# Altium PCB PCB.PcbDoc
Units mm, origin at the board's own origin, x right, y up, seen from the top; angles counter-clockwise.
Board outline 32.7 x 38.1 mm, 2 copper layers (Top Layer, Bottom Layer); 21 components, 26 nets, 84 pads, 0 vias.
Unrouted connection lines stored in the file: 9.
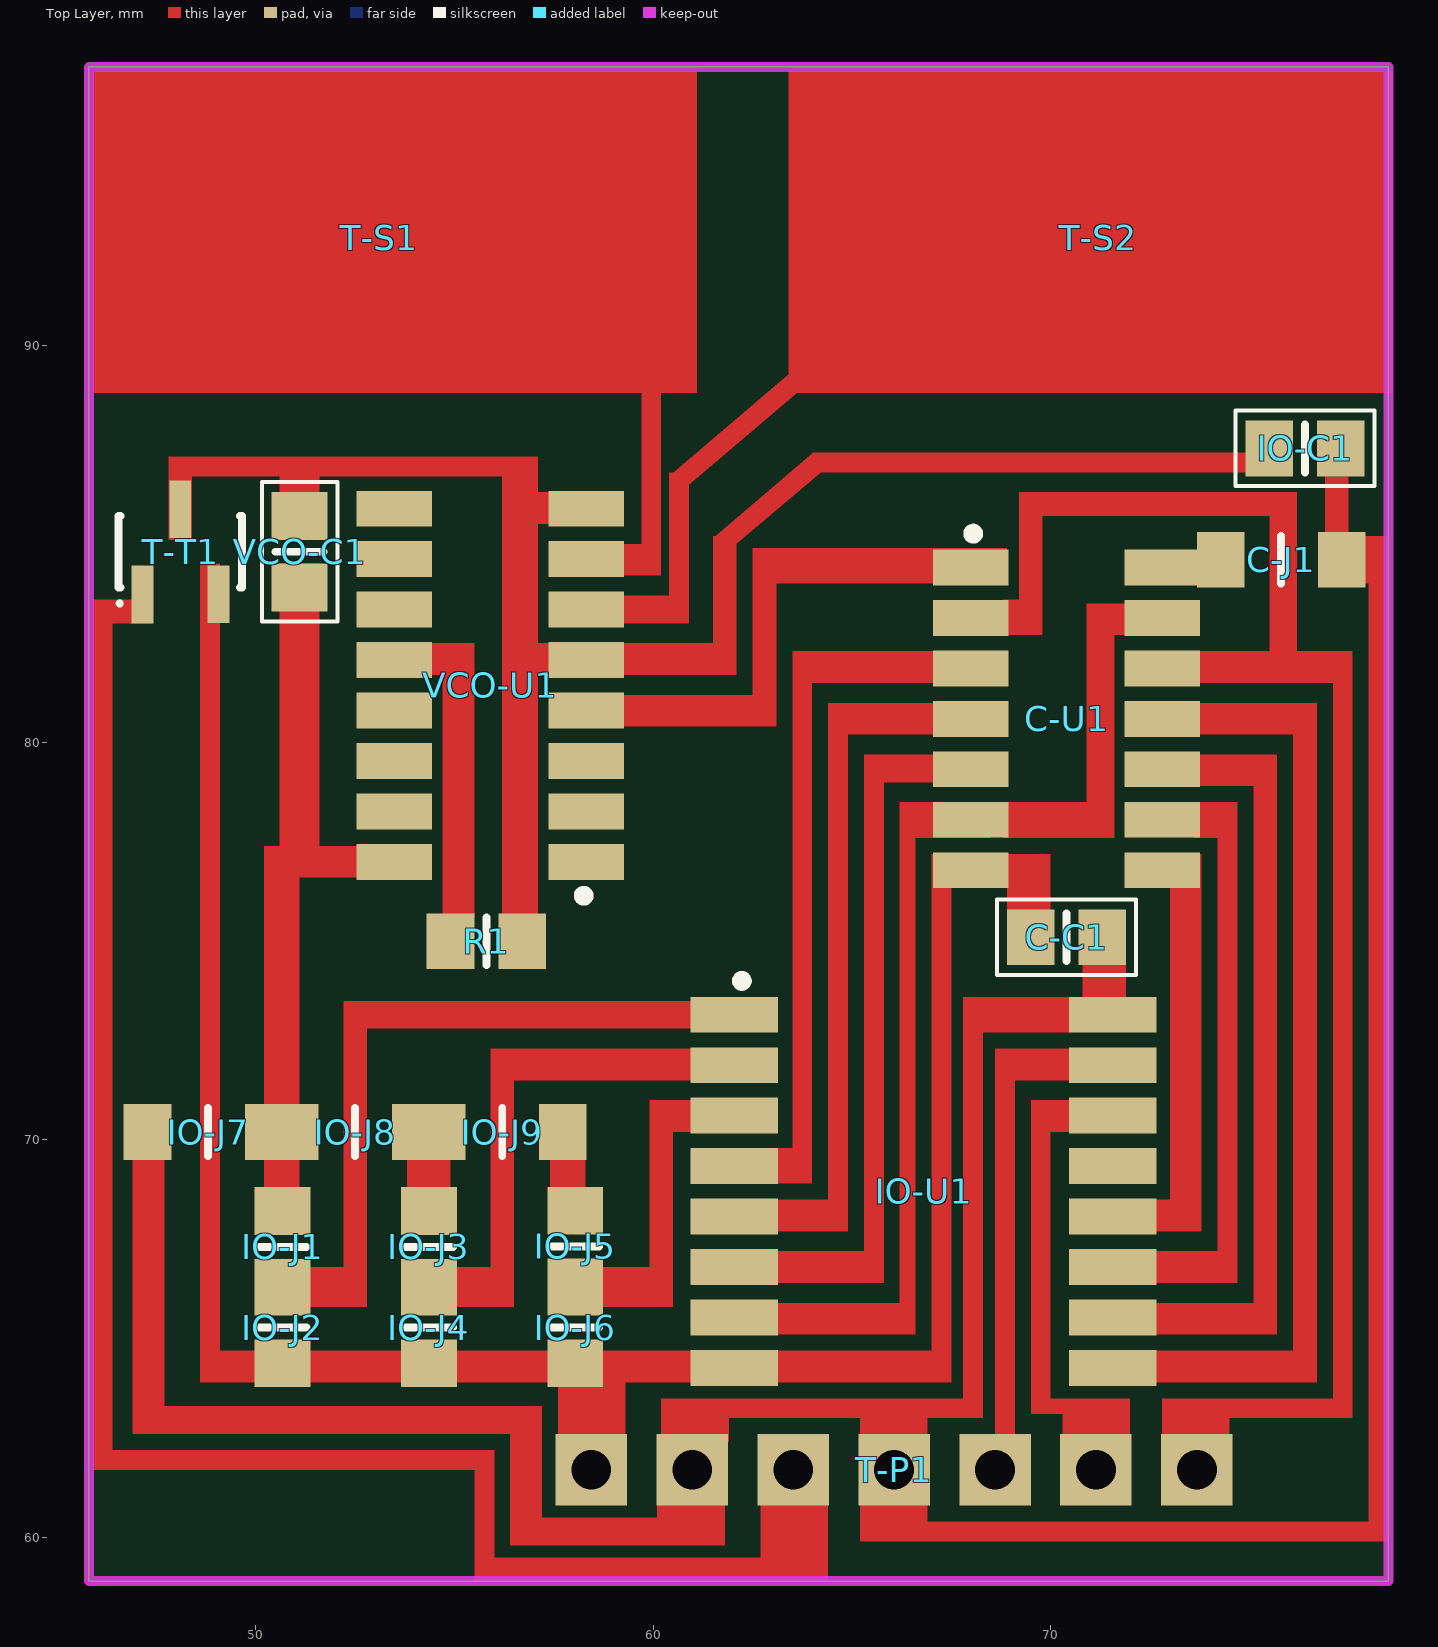
[diagram p0: Top Layer view]
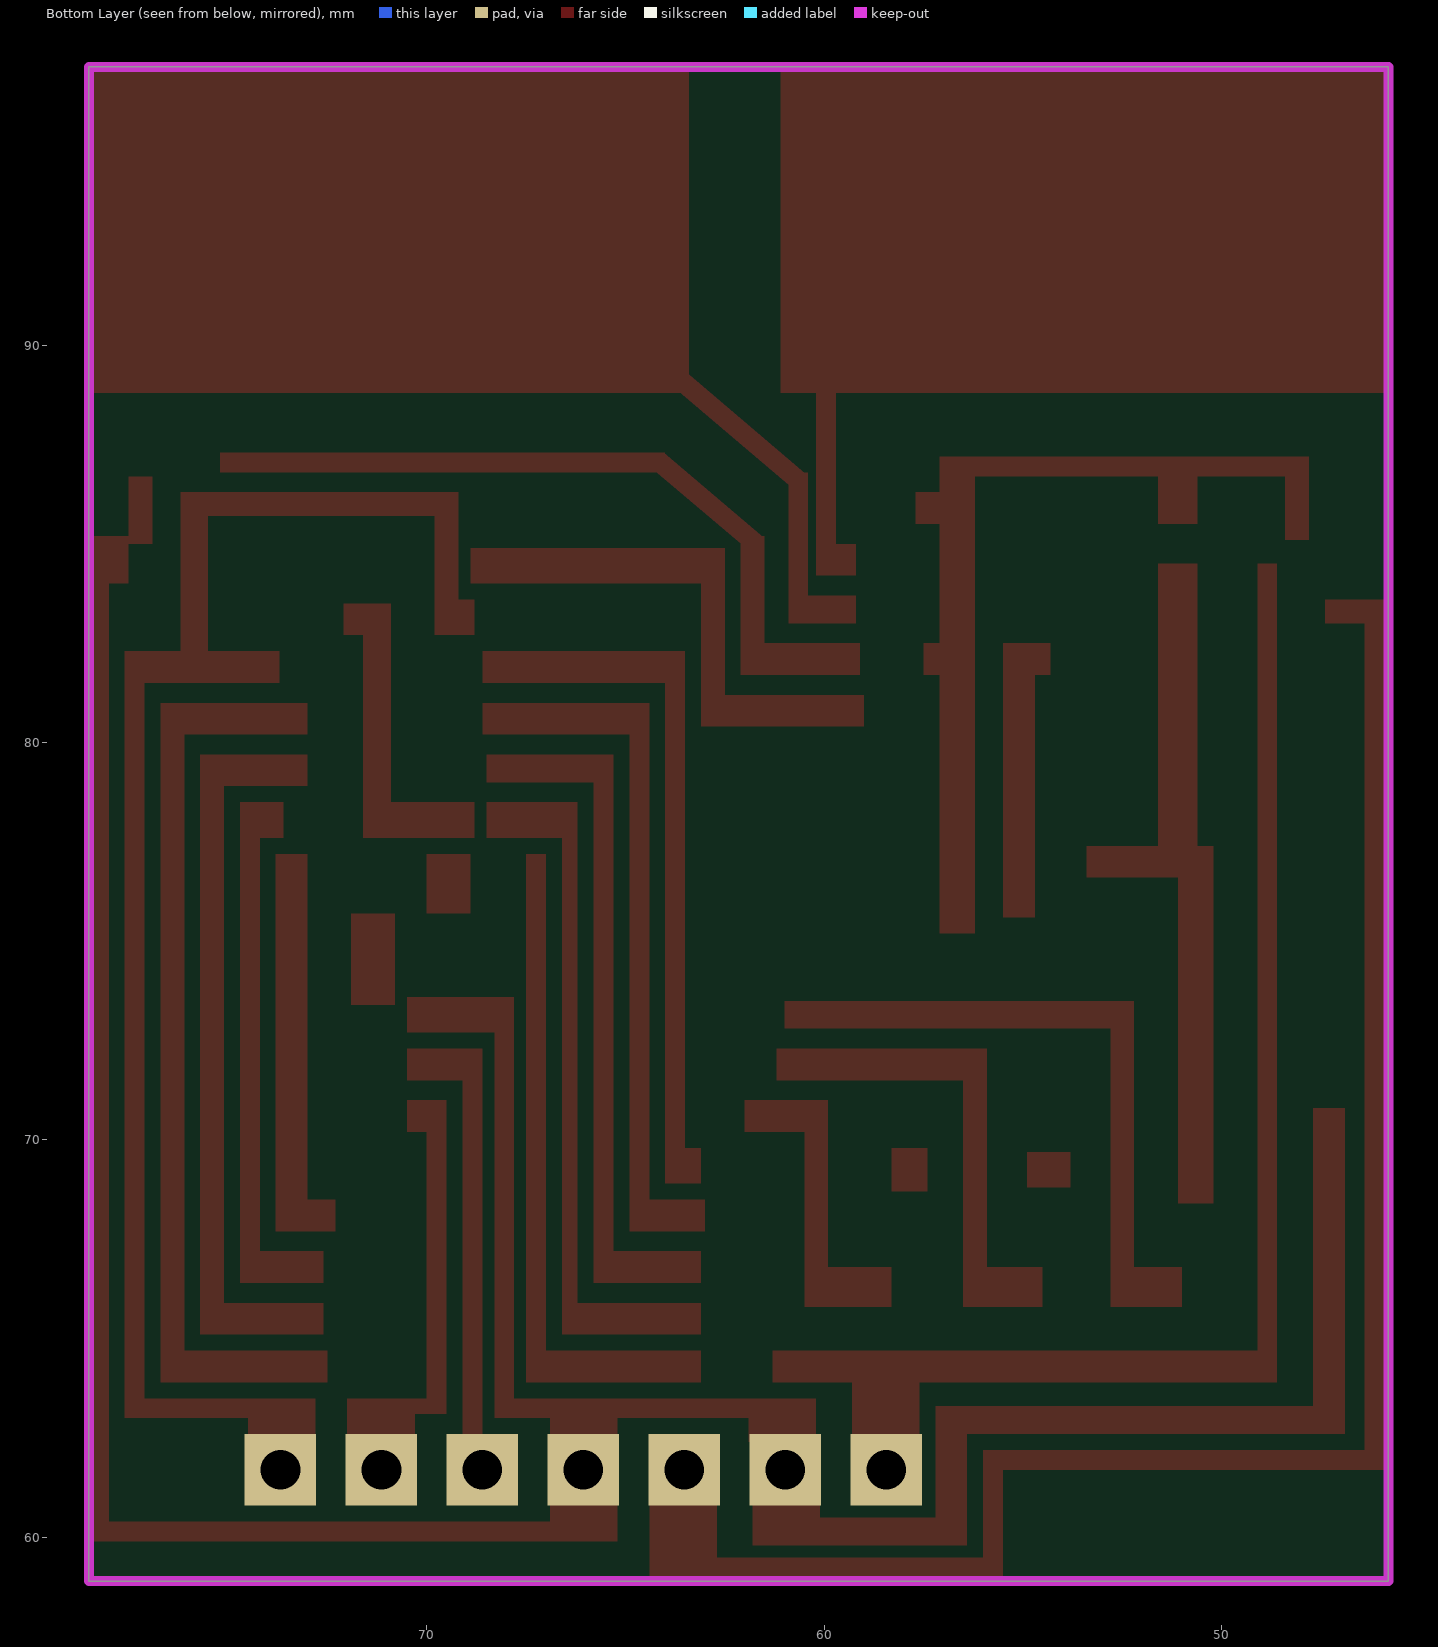
[diagram p1: Bottom Layer view, seen from below]

## Layer stack, top to bottom
Top Solder: solder mask 0.0102, Solder Resist, Dk 3.5
Top Layer: signal copper 0.0356
Dielectric 1: dielectric 0.32, FR-4, Dk 4.8
Bottom Layer: signal copper 0.0356
Bottom Solder: solder mask 0.0102, Solder Resist, Dk 3.5

## Board outline
45.8,58.9 45.8,97 78.5,97 78.5,58.9

## Design rules (kind name [scope] priority, off if disabled: settings)
Clearance [All] p1: gap=0.254
PolygonConnect [All] p1: connectstyle=Relief reliefconductorwidth=0.254 reliefentries=4 polygonreliefangle="90 Angle" airgapwidth=0.254
RoutingVias [All] p1: holewidth=0.711 width=1.27 viastyle="Through Hole" minholewidth=0.711 minwidth=1.27 maxholewidth=0.711 maxwidth=1.27
SolderMaskExpansion [All] p1: expansion=0.102
UnpouredPolygon [All] p1: allowunpoured=FALSE
Width [All] p1: maxlimit=0.254 minlimit=0.254 preferedwidth=0.254
29 further rules are at their usual default settings.

## Classes and differential pairs
component class 74HC393: C-C1 C-J1 C-U1
component class CD4046: R1 T-T1 VCO-C1 VCO-U1
component class Designator: IO-C1 IO-J1 IO-J2 IO-J3 IO-J4 IO-J5 IO-J6 IO-J7 IO-J8 IO-J9 IO-U1
component class Top: T-P1 T-S1 T-S2

## Components (designator, comment, footprint, x,y, rotation, side; value= is the part's Value field where it differs from the comment)
C-C1 "1uF" "C 0805 / 2012" 70.4,75.1 r180 top
C-J1 "0R" "R 0805 / 2012 wide" 75.8,84.6 r0 top
C-U1 "74HC393" SOIC-14 70.4,82.5 r0 top
IO-C1 "1uF" "C 0805 / 2012" 76.4,87.4 r180 top
IO-J1 "0R" "R 0805 / 2012" 50.673,67.31 r90 top
IO-J2 "0R" "R 0805 / 2012" 50.673,65.278 r90 top
IO-J3 "0R" "R 0805 / 2012" 54.356,67.31 r90 top
IO-J4 "0R" "R 0805 / 2012" 54.356,65.278 r90 top
IO-J5 "0R" "R 0805 / 2012" 58.039,67.321 r90 top
IO-J6 "0R" "R 0805 / 2012" 58.039,65.278 r90 top
IO-J7 "0R" "R 0805 / 2012 wide" 48.8,70.2 r180 top
IO-J8 "0R" "R 0805 / 2012 wide" 52.5,70.2 r180 top
IO-J9 "0R" "R 0805 / 2012 wide" 56.2,70.2 r180 top
IO-U1 "PCF8574" SOIC-16W 66.802,68.707 r0 top
R1 "100K" "R 0805 / 2012" 55.8,75 r0 top
T-P1 "Header 1x7" "Header 1x7" 68.6,61.7 r180 top
T-S1 "Screw M3" "Screw M3" 53.1,92.7 r0 top
T-S2 "Screw M3" "Screw M3" 71.2,92.7 r0 top
T-T1 "2N7000" SOT-23-3 48.1,84.8 r0 top
VCO-C1 "1uF" "C 0805 / 2012" 51.1,84.8 r90 top
VCO-U1 "CD4046" SOIC-16 55.9,78.9 r180 top

## Footprints (in the part's own frame and the unit in brackets; to place one, negate y for a bottom-side part, rotate by r counter-clockwise, add the part's x,y. Pads: shape width x height; smd on the part's side, far side on the other; paste and mask are expansions set on the pad)
"C 0805 / 2012" [mm] "Capacitor 0805 / 2012 (2.0 x 1.2 mm)"
  rect 1.2x1.4 smd: 1(-0.9,0) 2(0.9,0)
  silkscreen extent -1.75,-0.95 1.75,0.95, body extent -1,-0.62 1,0.62, height 0.78
"Header 1x7" [mm] "2.54mm"
  rect 1.8x1.8 hole 1: 1(-5.08,0) 2(-2.54,0) 3(0,0) 4(2.54,0) 5(5.08,0) 6(7.62,0) 7(10.16,0)
  body extent -6.35,-1.27 11.43,1.27, height 8.6
"R 0805 / 2012" [mm] "Resistor 0805 / 2012 (2.0 x 1.2 mm)"
  rect 1.2x1.4 smd: 1(-0.9,0) 2(0.9,0)
  silkscreen extent 0,-0.6 0,0.6, body extent -1,-0.62 1,0.62, height 0.45
"R 0805 / 2012 wide" [mm] "Resistor 0805 / 2012 (2.0 x 1.2 mm)"
  rect 1.2x1.4 smd: 1(-1.524,0) 2(1.524,0)
  silkscreen extent 0,-0.6 0,0.6, body extent -1,-0.62 1,0.62, height 0.45
"Screw M3" [mm]
  body extent -6,-6 6,6, height 11.2
SOIC-14 [mm]
  rect 1.9x0.9 smd: 1(-2.413,1.905) 2(-2.413,0.635) 3(-2.413,-0.635) 4(-2.413,-1.905) 5(-2.413,-3.175) 6(-2.413,-4.445) 7(-2.413,-5.715) 8(2.413,-5.715) 9(2.413,-4.445) 10(2.413,-3.175) 11(2.413,-1.905) 12(2.413,-0.635) 13(2.413,0.635) 14(2.413,1.905)
  silkscreen extent -2.47,2.63 -2.22,2.88, body extent -3.05,-6.28 3.03,2.47, height 1.75
SOIC-16 [mm]
  rect 1.9x0.9 smd: 1(-2.413,1.905) 2(-2.413,0.635) 3(-2.413,-0.635) 4(-2.413,-1.905) 5(-2.413,-3.175) 6(-2.413,-4.445) 7(-2.413,-5.715) 8(-2.413,-6.985) 9(2.413,-6.985) 10(2.413,-5.715) 11(2.413,-4.445) 12(2.413,-3.175) 13(2.413,-1.905) 14(2.413,-0.635) 15(2.413,0.635) 16(2.413,1.905)
  silkscreen extent -2.48,2.63 -2.23,2.88, body extent -3.03,-7.54 3.05,2.46, height 1.75
SOIC-16W [mm]
  rect 2.2x0.9 smd: 1(-4.763,4.445) 2(-4.763,3.175) 3(-4.763,1.905) 4(-4.763,0.635) 5(-4.763,-0.635) 6(-4.763,-1.905) 7(-4.763,-3.175) 8(-4.763,-4.445) 9(4.763,-4.445) 10(4.763,-3.175) 11(4.763,-1.905) 12(4.763,-0.635) 13(4.763,0.635) 14(4.763,1.905) 15(4.763,3.175) 16(4.763,4.445)
  silkscreen extent -4.7,5.17 -4.45,5.42, body extent -5.2,-5.25 5.2,5.25, height 2.65
SOT-23-3 [mm]
  rect 0.55x1.45 smd: 1(-0.95,-1.075) 2(0.965,-1.067) 3(0,1.067)
  silkscreen extent -1.57,-1.35 1.55,0.9, body extent -1.49,-1.32 1.51,1.28, height 1.1

## Part data
C-C1 IO-C1 VCO-C1: library part Capacitor
C-J1 IO-J1 IO-J2 IO-J3 IO-J4 IO-J5 IO-J6 IO-J7 IO-J8 IO-J9 R1: library part Resistor
C-U1: "Dual 4-Bit Counter"
IO-U1: "8-Bit I/O-Expander"
T-T1: "N-FET"
VCO-U1: "PLL / VCO"

## Nets (pads, with @x,y where several pads share a name; then routed paths per layer and width w, separated by ;. In a path a pad name is that pad's centre, name@x,y a point inside that pad or via, vN(x,y) a via of type N, cw(c..) or ccw(c..) an arc to the next point about the centre after c; other vN are vias at no path point)
3.3V: C-C1.1 C-J1.2 IO-C1.1 IO-J7.2 IO-U1.16 T-P1.4 T-P1.6 VCO-C1.1 VCO-U1.16
ENABLE: T-P1.5 T-T1.1
GND: C-C1.2 C-U1.7 IO-C1.2 IO-J2.1 IO-J4.1 IO-J6.1 IO-U1.8 R1.2 T-P1.7 T-T1.2 VCO-U1.5
"IO-BIT 0": C-U1.3 IO-U1.4
"IO-BIT 1": C-U1.4 IO-U1.5
"IO-BIT 2": C-U1.5 IO-U1.6
"IO-BIT 3": C-U1.6 C-U1.13 IO-U1.7
"IO-BIT 4": C-U1.11 IO-U1.9
"IO-BIT 5": C-U1.10 IO-U1.10
"IO-BIT 6": C-U1.9 IO-U1.11
"IO-BIT 7": C-U1.8 IO-U1.12
NetC-J1_1: C-J1.1 C-U1.14
NetC-U1_1: C-U1.1 VCO-U1.4
NetIO-J1_1: IO-J1.1 IO-J2.2 IO-U1.1
NetIO-J1_2: IO-J1.2 IO-J7.1 IO-J8.2
NetIO-J3_1: IO-J3.1 IO-J4.2 IO-U1.2
NetIO-J3_2: IO-J3.2 IO-J8.1 IO-J9.2
NetIO-J5_1: IO-J5.1 IO-J6.2 IO-U1.3
NetIO-J5_2: IO-J5.2 IO-J9.1
NetR1_1: R1.1 VCO-U1.12
NetT-T1_3: T-T1.3 VCO-C1.2 VCO-U1.8
RESET: C-U1.2 C-U1.12 T-P1.1
SCL: IO-U1.14 T-P1.2
SDA: IO-U1.15 T-P1.3
VCO-C-A: VCO-U1.6
VCO-C-B: VCO-U1.7
pads on no net: IO-U1.13 VCO-U1.1 VCO-U1.2 VCO-U1.3 VCO-U1.9 VCO-U1.10 VCO-U1.11 VCO-U1.13 VCO-U1.14 VCO-U1.15

## Keep-outs
Keep-Out Layer:
  lines w0.254: 45.8,58.9 45.8,97 46.1,97 78.5,97 78.5,58.9 45.8,58.9

## Other copper
Top Layer:
  rectangle: 63.4,88.8 78.6,96.9
  rectangle net VCO-C-B: 45.9,88.8 61.1,96.9
  region net VCO-C-A: 60.8,86.4 65.17,90.115 64.846,90.495 60.476,86.781
  rectangle net 3.3V: 65.2,60.4 66.9,63.1
  rectangle net SCL: 70.3,61.8 71.9,62.5
  rectangle: 47.8,85.1 48.4,86.8
  rectangle net ENABLE: 45.9,83 47.4,83.6
  rectangle: 50.6,77.3 51.6,84.5
  region net GND: 61.838,84.776 64.356,86.916 64.032,87.297 61.514,85.157
  rectangle net GND: 64,86.8 75.2,87.3
  rectangle net VCO-C-A: 60.4,83 60.9,86.8
  rectangle net VCO-C-A: 59.2,83 60.6,83.7
  rectangle net VCO-C-B: 59.7,84.2 60.2,88.9
  rectangle net VCO-C-B: 59.2,84.2 59.7,85
  rectangle net 3.3V: 76.9,85 77.5,86.7
  rectangle net GND: 61.5,82.5 62.1,85.2
  rectangle net GND: 59.1,81.7 62.1,82.5
  rectangle net GND: 68.9,75.7 70,77.2
  rectangle net 3.3V: 70.8,73.4 71.9,75.7
  rectangle net ENABLE: 45.9,61.7 46.4,83.4
  rectangle net ENABLE: 46.4,61.7 55.5,62.2
  rectangle net ENABLE: 55.5,58.9 56,62.2
  rectangle net ENABLE: 56,58.9 64.4,59.5
  rectangle net ENABLE: 62.7,59.5 64.4,60.9
  rectangle net 3.3V: 46.9,63.1 47.7,70.8
  rectangle net 3.3V: 46.9,62.6 56.4,63.3
  rectangle net 3.3V: 56.4,60.3 57.2,63.3
  rectangle net 3.3V: 56.4,59.8 61.8,60.5
  rectangle net GND: 57.6,62.1 59.3,63.9
  rectangle net GND: 50.6,85.5 51.6,87.1
  rectangle net NetC-U1_1: 62.5,84 68.9,84.9
  rectangle net NetC-U1_1: 62.5,81.2 63.1,84.9
  rectangle net NetC-U1_1: 59,80.4 63.1,81.2
  rectangle net NetIO-J3_2: 53.8,68.8 54.9,69.7
  rectangle net NetIO-J5_2: 57.4,68.7 58.3,69.8
  rectangle net 3.3V: 61.8,63 67.8,63.5
  rectangle net 3.3V: 60.1,60.3 61.8,60.9
  rectangle net 3.3V: 65.2,59.9 78.5,60.4
  rectangle net RESET: 72.8,62.2 74.5,63
  rectangle net RESET: 72.8,63 77.1,63.5
  rectangle net 3.3V: 60.2,62.4 61.9,63.5
  rectangle net SCL: 70.3,62.5 72,63.1
  rectangle net SCL: 70,63.1 72,63.5
  rectangle net 3.3V: 78,60.4 78.5,85.2
  rectangle net 3.3V: 77.5,84 78.3,85.2
  rectangle: 51,76.6 53.4,77.4
  rectangle net NetIO-J1_2: 50.2,68.4 51.1,77.4
  rectangle net GND: 47.8,86.7 57.1,87.2
  rectangle net GND: 48.6,63.9 49.1,84.5
  rectangle net RESET: 75.5,82 76.2,86.3
  rectangle net RESET: 69.8,85.7 75.6,86.3
  rectangle net RESET: 69.2,83.6 69.8,86.3
  rectangle net RESET: 68.8,82.7 69.8,83.6
  rectangle net RESET: 77.1,63 77.6,82.3
  rectangle net RESET: 73.7,81.5 77.1,82.3
  rectangle net NetR1_1: 54.3,81.7 54.7,82.5
  rectangle net NetR1_1: 54.7,75.6 55.5,82.5
  rectangle net GND: 56.7,81.7 57.5,82.5
  rectangle: 56.2,75.2 57.1,87.1
  rectangle net GND: 56.5,85.5 57.7,86.3
  rectangle net 3.3V: 67.8,63 68.3,72.7
  rectangle net 3.3V: 67.8,72.7 70.5,73.6
  rectangle net SDA: 68.6,61.9 69.1,72.3
  rectangle net SDA: 69.1,71.5 70.5,72.3
  rectangle net SCL: 69.5,63.1 70,71
  rectangle net SCL: 70,70.2 70.5,71
  rectangle net "IO-BIT 6": 73.6,77.6 74.2,78.5
  rectangle net "IO-BIT 4": 73,80.2 76.1,81
  rectangle net "IO-BIT 4": 76.1,63.9 76.7,81
  rectangle net "IO-BIT 4": 72.5,63.9 76.1,64.7
  rectangle net "IO-BIT 5": 73,78.9 75.1,79.7
  rectangle net "IO-BIT 5": 75.1,65.1 75.7,79.7
  rectangle net "IO-BIT 5": 72.6,65.1 75.1,65.9
  rectangle net "IO-BIT 6": 74.2,66.4 74.7,78.5
  rectangle net "IO-BIT 6": 72.6,66.4 74.2,67.2
  rectangle net "IO-BIT 7": 72.3,67.7 73,68.5
  rectangle net "IO-BIT 7": 73,67.7 73.8,77.2
  rectangle net "IO-BIT 3": 70.9,82.7 72.1,83.5
  rectangle net "IO-BIT 3": 70.9,78.4 71.6,83.5
  rectangle net "IO-BIT 3": 68.8,77.6 71.6,78.5
  rectangle net GND: 67,63.9 67.5,77.2
  rectangle net GND: 63.1,63.9 67,64.7
  rectangle net "IO-BIT 3": 66.6,77.6 68.5,78.5
  rectangle net "IO-BIT 3": 66.2,65.1 66.6,78.5
  rectangle net "IO-BIT 3": 63.1,65.1 66.2,65.9
  rectangle net "IO-BIT 2": 65.8,79 68.5,79.7
  rectangle net "IO-BIT 2": 65.3,66.4 65.8,79.7
  rectangle net "IO-BIT 2": 63.1,66.4 65.3,67.2
  rectangle net "IO-BIT 1": 64.9,80.2 68.6,81
  rectangle net "IO-BIT 1": 64.4,67.7 64.9,81
  rectangle net "IO-BIT 1": 63,67.7 64.4,68.5
  rectangle net "IO-BIT 0": 63.7,81.5 68.6,82.3
  rectangle net "IO-BIT 0": 63.5,69.8 64,82.3
  rectangle net "IO-BIT 0": 63.1,68.9 64,69.8
  rectangle net NetIO-J5_1: 59.9,70.2 62,71
  rectangle net NetIO-J5_1: 59.9,65.8 60.5,70.2
  rectangle net NetIO-J5_1: 58.3,65.8 59.9,66.8
  rectangle net NetIO-J3_1: 55.9,65.8 56.5,72.3
  rectangle net NetIO-J3_1: 54.5,65.8 56.1,66.8
  rectangle net NetIO-J1_1: 51,65.8 52.6,66.8
  rectangle net NetIO-J1_1: 52.2,65.8 52.8,73.5
  rectangle net NetIO-J3_1: 56.5,71.5 61.2,72.3
  rectangle net NetIO-J1_1: 52.8,72.8 61,73.5
  rectangle net GND: 49,63.9 61.3,64.7